# Altium PCB PowerLatch.PcbDoc
Units mm, origin at the board's own origin, x right, y up, seen from the top; angles counter-clockwise.
Board outline 57.53 x 27.52 mm, 2 copper layers (Top Layer, Bottom Layer); 34 components, 14 nets, 79 pads, 1 vias.
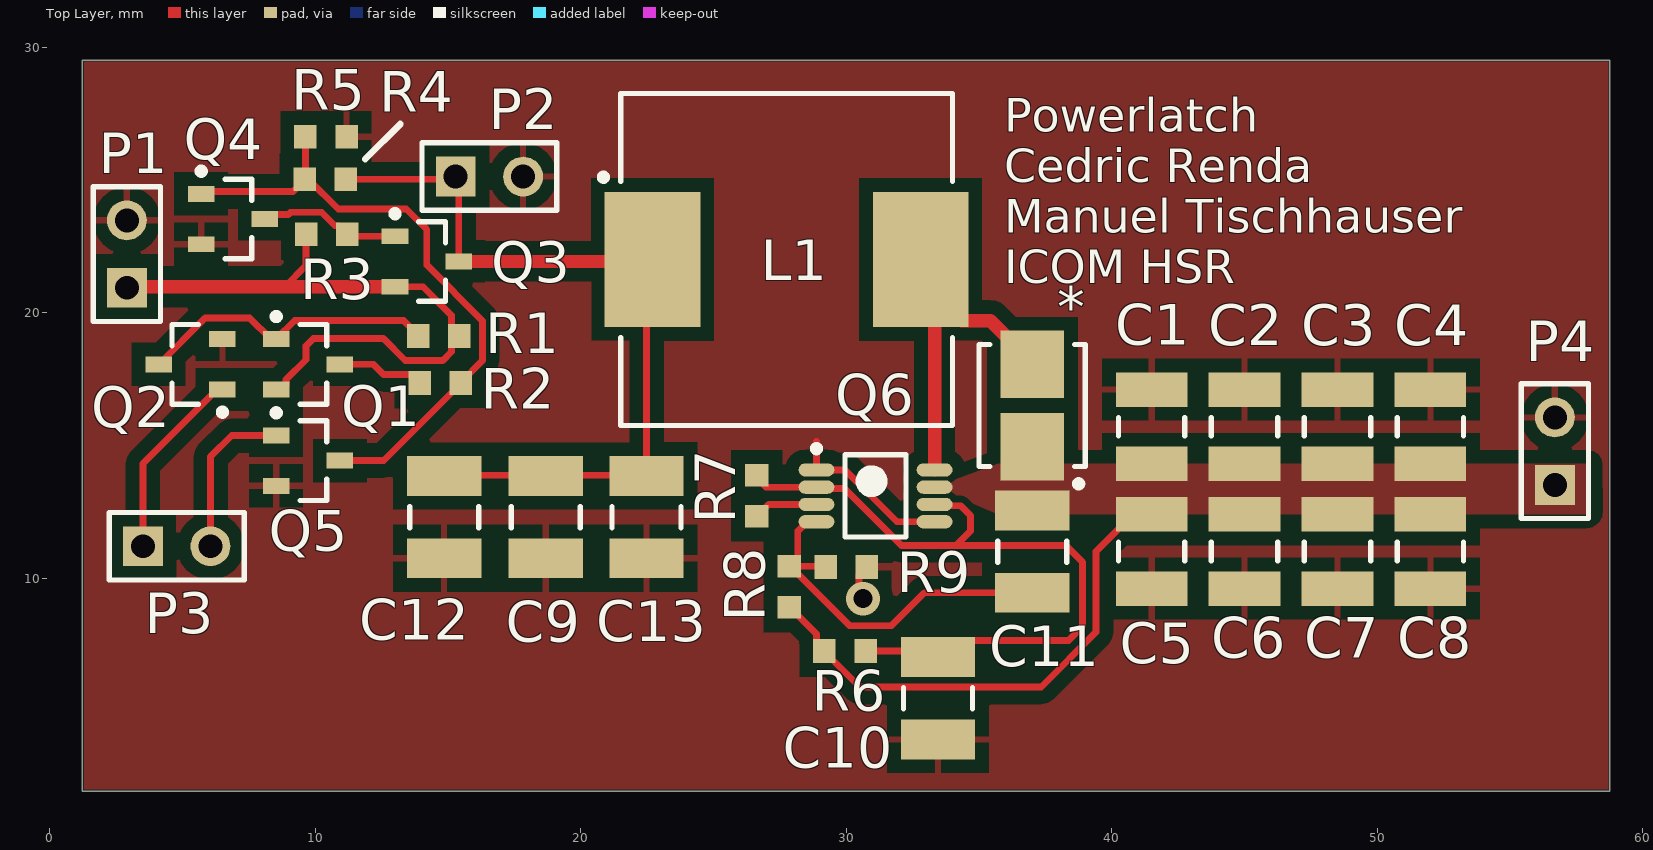
[diagram p0: Top Layer view]
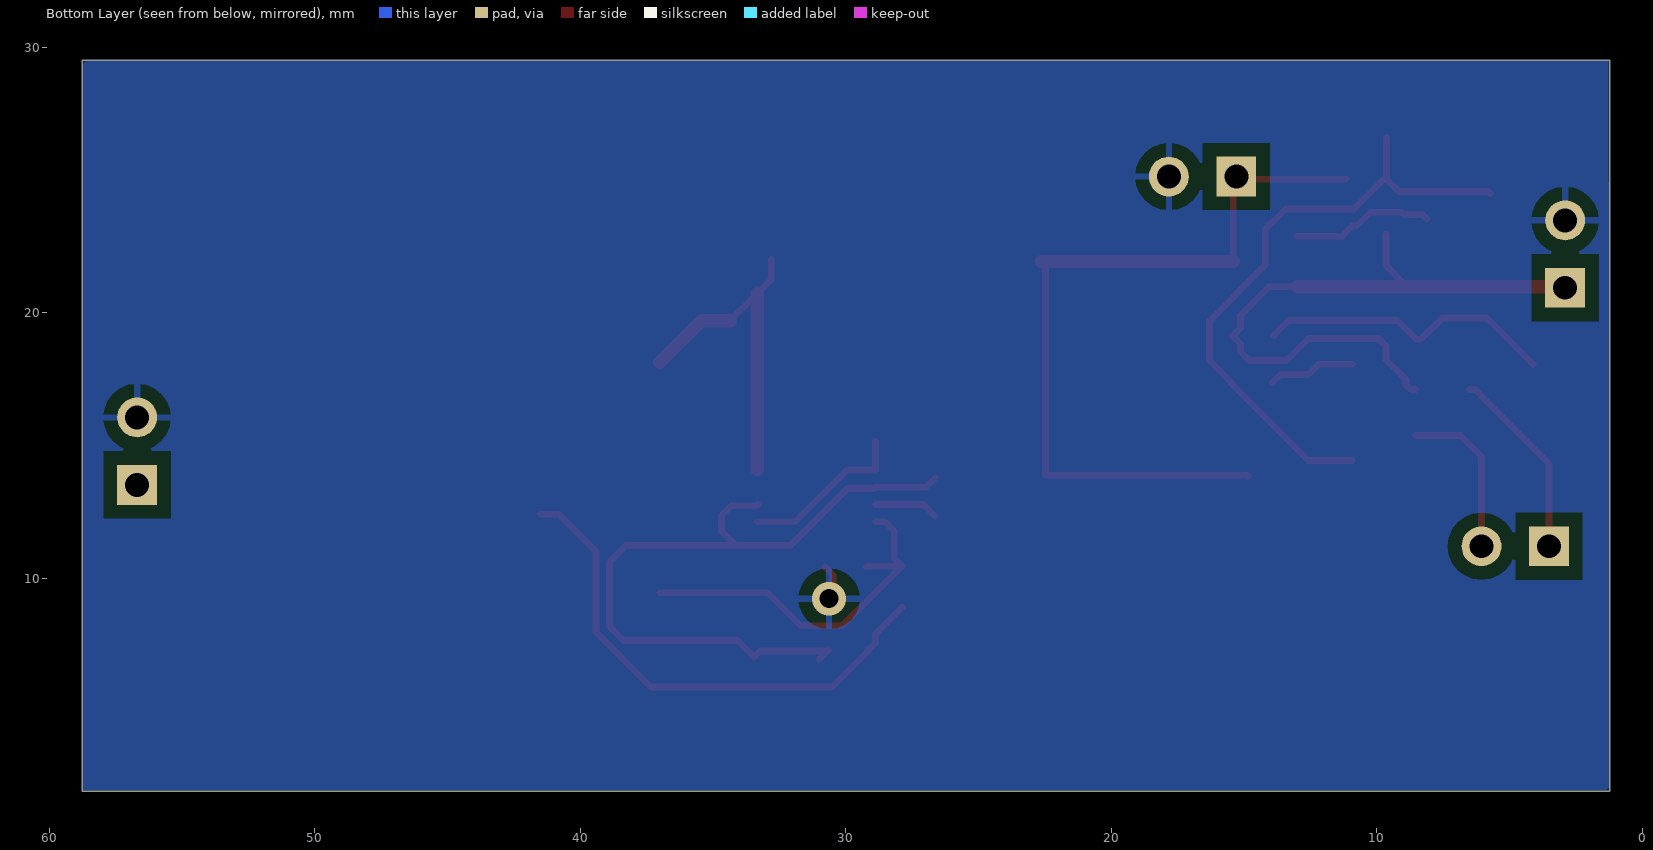
[diagram p1: Bottom Layer view, seen from below]
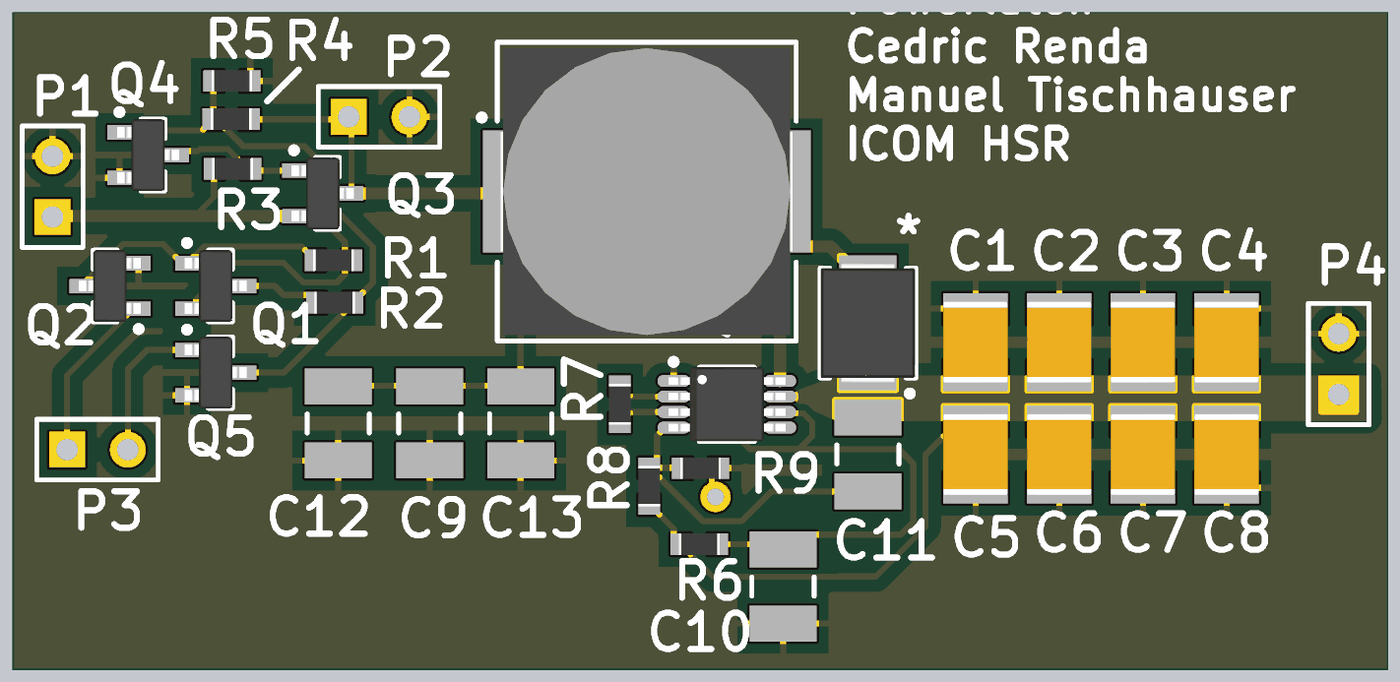
[diagram p2: 3D render of the assembled board from above, using the file's embedded part models]

## Layer stack, top to bottom
Top Solder: solder mask 0.0102, Solder Resist, Dk 3.5
Top Layer: signal copper 0.0356
Dielectric 1: dielectric 0.32, FR-4, Dk 4.8
Bottom Layer: signal copper 0.0356
Bottom Solder: solder mask 0.0102, Solder Resist, Dk 3.5

## Board outline
1.225,1.975 1.225,29.5 58.75,29.5 58.75,1.975

## Design rules (kind name [scope] priority, off if disabled: settings)
Clearance [InComponent('Q6')] p1: gap=0.254 ignorepadtopadclearanceinfootprint=TRUE except(0: Arc-Hole Track-Hole SMDPad-Hole THPad-Hole Via-Hole Fill-Hole Poly-Hole Region-Hole Text-Hole; 0.127: Arc-SMDPad Track-SMDPad SMDPad-SMDPad)
Clearance Clearance_1 [All] p2: gap=0.254 ignorepadtopadclearanceinfootprint=FALSE except(0: Arc-Hole Track-Hole SMDPad-Hole THPad-Hole Via-Hole Fill-Hole Poly-Hole Region-Hole Text-Hole)
Clearance Clearance_2 [InPolygon] p3: gap=0.508 ignorepadtopadclearanceinfootprint=FALSE
ComponentClearance [All] p1: gap=0 collisioncheckmode=3 verticalgap=0 showdistances=TRUE
PolygonConnect [InNet('Net*_2')] p1: connectstyle=Direct reliefconductorwidth=0.254 reliefentries=4 polygonreliefangle="90 Angle" airgapwidth=0.254
PolygonConnect PolygonConnect_1 [All] p2: connectstyle=Relief reliefconductorwidth=0.254 reliefentries=4 polygonreliefangle="90 Angle" airgapwidth=0.508
RoomDefinition PowerLatch [InComponentClass('PowerLatch')] p1 off: confinementstyle=ConfineIn formatcopy=TRUE lockcomponents=FALSE outline 1.3,2.05 58.7,2.05 58.7,29.45 1.3,29.45
RoutingVias [All] p1: holewidth=0.711 width=1.27 viastyle="Through Hole" minholewidth=0.711 minwidth=1.27 maxholewidth=0.711 maxwidth=1.27
SolderMaskExpansion [All] p1: expansion=0.102
Width [All] p1: maxlimit=1.27 minlimit=0.127 preferedwidth=0.254
29 further rules are at their usual default settings.

## Components (designator, comment, footprint, x,y, rotation, side; value= is the part's Value field where it differs from the comment)
* "Schottky" DIOM4336X25N 37,16.5 r270 top
C1 "Cap" CAPC3225X28N 41.5,15.7 r270 top value=22uF
C2 "Cap" CAPC3225X28N 45,15.7 r270 top value=22uF
C3 "Cap" CAPC3225X28N 48.5,15.7 r270 top value=22uF
C4 "Cap" CAPC3225X28N 52,15.7 r270 top value=22uF
C5 "Cap" CAPC3225X28N 41.5,11 r90 top value=22uF
C6 "Cap" CAPC3225X28N 45,11 r90 top value=22uF
C7 "Cap" CAPC3225X28N 48.5,11 r90 top value=22uF
C8 "Cap" CAPC3225X28N 52,11 r90 top value=22uF
C9 "Cap" C1210_M 18.675,12.3 r270 top value=22uF
C10 "Cap" C1210_M 33.45,5.475 r90 top value=1u
C11 "Cap" C1210_M 37,11 r270 top value=39pF
C12 "Cap" C1210_M 14.85,12.3 r270 top value=22uF
C13 "Cap" C1210_M 22.475,12.3 r270 top value=22uF
L1 "Inductor" INDP120120X100N 27.75,22 r0 top
P1 "Header 2" HDR1X2 2.9,20.935 r90 top
P2 "Header 2" HDR1X2 15.285,25.125 r0 top
P3 "Header 2" HDR1X2 3.51,11.2 r0 top
P4 "Header 2" HDR1X2 56.688,13.513 r90 top
Q1 "MOSFET P-Channel" SOT95P245X110-3N 9.725,18.05 r0 top
Q2 "MOSFET N-Channel" SOT95P245X110-3N 5.3,18.05 r180 top
Q3 "MOSFET P-Channel" SOT95P245X110-3N 14.2,21.925 r0 top
Q4 "MOSFET N-Channel" SOT95P245X110-3N 6.9,23.525 r0 top
Q5 "MOSFET N-Channel" SOT95P245X110-3N 9.725,14.425 r0 top
Q6 "LMR61428" TSOP65P490X110-8N 31.1,13.1 r0 top
R1 "Res1" RESC1608X06N 14.65,19.125 r0 top value=10K
R2 "Res1" RESC1608X06N 14.7,17.35 r180 top value=1K
R3 "Res1" RESC1608X06N 10.425,22.95 r180 top value=100K
R4 "Res1" RESC1608X06N 10.375,25.025 r0 top value=1K
R5 "Res1" RESC1608X06N 10.4,26.625 r180 top value=1M
R6 "Res1" RESC1608X06N 29.95,7.25 r0 top value=50
R7 "Res1" RESC1608X06N 26.625,13.1 r270 top value=200K
R8 "Res1" RESC1608X06N 27.85,9.675 r270 top value=150K
R9 "Res1" RESC1608X06N 30,10.425 r0 top value=50K

## Footprints (in the part's own frame and the unit in brackets; to place one, negate y for a bottom-side part, rotate by r counter-clockwise, add the part's x,y. Pads: shape width x height; smd on the part's side, far side on the other; paste and mask are expansions set on the pad)
C1210_M [mm] "Chip Capacitor, Body 3.2x2.5mm, IPC Low Density"
  rect 1.5x2.8 smd: 1(-1.55,0) 2(1.55,0)
  silkscreen extent -0.4,-1.3 0.4,1.3, body extent -1.7,-1.35 1.7,1.35, height 1.5
CAPC3225X28N [mm] "Chip Capacitor, 2-Leads, Body 3.20x2.50mm, IPC Medium Density"
  rect 1.3x2.7 smd: 1(-1.4,0) 2(1.4,0)
  silkscreen extent -0.35,-1.25 0.35,1.25, body extent -1.7,-1.35 1.7,1.35, height 2.8
DIOM4336X25N [mm] "Molded Diode, 2-Leads, Body 4.33x3.63mm, IPC Medium Density"
  rect 2.55x2.4 smd: 1(-1.55,0) 2(1.55,0)
  silkscreen extent -2.3,-2 3.07,2, body extent -2.52,-1.97 2.52,1.97, height 2.47
HDR1X2 [mm] "Connector; Header; 2 Position"
  rect 1.5x1.5 hole 0.9: 1(0,0)
  round 1.5 hole 0.9: 2(2.54,0)
  silkscreen extent -1.27,-1.27 3.81,1.27
INDP120120X100N [mm] "Precision Wire Wound Inductor, 2-Leads, Body 12.00x12.00mm, IPC Medium Density"
  rect 3.6x5.1 smd: 1(-5.05,0) 2(5.05,0)
  silkscreen extent -7.02,-6.25 6.25,6.25, body extent -6.1,-6 6.1,6, height 10.1
RESC1608X06N [mm] "Chip Resistor, 2-Leads, Body 1.60x0.80mm, IPC Medium Density"
  rect 0.85x0.9 smd: 1(-0.775,0) 2(0.775,0)
  body extent -0.85,-0.45 0.85,0.45, height 0.55
SOT95P245X110-3N [mm] "SOT23, 3-Leads, Body 2.90x2.45mm, Pitch 0.95mm, IPC Medium Density"
  rect 1x0.6 smd: 1(-1.2,0.95) 2(-1.2,-0.95) 3(1.2,0)
  silkscreen extent -1.32,-1.5 0.7,1.92, body extent -1.3,-1.5 1.3,1.5, height 1.1
TSOP65P490X110-8N [mm] "TSOP, 8-Leads, Body 3.00x3.00mm, Pitch 0.65mm, IPC Medium Density"
  oval 1.35x0.5 smd: 1(-2.225,0.975) 2(-2.225,0.325) 3(-2.225,-0.325) 4(-2.225,-0.975) 5(2.225,-0.975) 6(2.225,-0.325) 7(2.225,0.325) 8(2.225,0.975)
  silkscreen extent -2.35,-1.55 1.15,1.9, body extent -2.45,-1.55 2.45,1.55, height 1.1

## Part data
C1 C2 C3 C4 C5 C6 C7 C8 C9 C10 C11 C12 C13: "Capacitor", LatestRevisionDate=17-Jul-2002, LatestRevisionNote="Re-released for DXP Platform.", PackageDescription="Radial Cap, Thru-Hole; 2 Leads; 0.3 in Pin Spacing", PackageReference=RAD-0.3, Published=8-Jun-2000, Publisher="Altium Limited"
P1 P2 P3 P4: "Header, 2-Pin", LatestRevisionDate=17-Jul-2002, LatestRevisionNote="Re-released for DXP Platform.", Publisher="Altium Limited"
Q6: "Step-Up Voltage Regulator"
R1 R2 R3 R4 R5 R6 R7 R8 R9: "Resistor", LatestRevisionDate=17-Jul-2002, LatestRevisionNote="Re-released for DXP Platform.", PackageDescription="Axial Device, Thru-Hole; 2 Leads; 0.3 in Pin Spacing", PackageReference=AXIAL-0.3, Published=8-Jun-2000, Publisher="Altium Limited"

## Via types
v1: diameter 1.27, hole 0.711, Top Layer to Bottom Layer, 1 vias

## Nets (pads, with @x,y where several pads share a name; then routed paths per layer and width w, separated by ;. In a path a pad name is that pad's centre, name@x,y a point inside that pad or via, vN(x,y) a via of type N, cw(c..) or ccw(c..) an arc to the next point about the centre after c; other vN are vias at no path point)
GND: C1.1 C2.1 C3.1 C4.1 C5.1 C6.1 C7.1 C8.1 C9.2 C10.1 C12.2 C13.2 P1.2 P2.2 P4.2 Q2.2 Q4.2 Q5.2 Q6.1 Q6.5 R5.1 R9.2 | length 7.3
  Top Layer w0.254: 28.875,15.15 Q6.1 29.95,14.075 31.9,12.125 Q6.5 ; v1@30.477,9.602 30.477,10.127 R9.2
  other v1: 30.625,9.225
Net*_1: *.1 L1.2 Q6.8 | length 13
  Top Layer w0.254: L1.2 32.8,21.25 33.325,20.725 L1.2@34.35,19.7 ; *.1@37,17.975 *.1 *.1@37,18.125
  Top Layer w0.508: Q6.8 L1.2@33.325,20.725 ; L1.2@34.35,19.7 35.425,19.7 *.1@37,18.125
Net*_2: *.2 C1.2 C2.2 C3.2 C4.2 C5.2 C6.2 C7.2 C8.2 C11.1 P4.1 Q6.7 R6.1 R8.2 | length 19.6
  Top Layer w0.254: R8.2 27.875,8.9 28.877,7.898 28.877,7.548 R6.1 29.175,7.225 30.506,5.894 35.744,5.894 35.75,5.9 37.343,5.9 39.408,7.965 39.408,11.008 40.8,12.4 C5.2
NetC9_1: C9.1 C12.1 C13.1 L1.1 P2.1 Q3.3 R4.2 | length 30.5
  Top Layer w0.254: R4.2 15.185,25.025 P2.1 15.4,25.01 Q3.3 ; C12.1 14.875,13.875 18.675,13.875 22.475,13.875 22.475,21.775 22.625,21.925 L1.1
  Top Layer w0.508: Q3.3 L1.1@22.625,21.925
NetC10_2: C10.2 Q6.2 Q6.6 R6.2 R7.1 | length 28.2
  Top Layer w0.254: R7.1@26.625,13.775 26.975,13.425 Q6.2 28.922,13.378 29.929,13.378 32.077,11.23 34.13,11.23 ; R6.2@30.638,7.287 R6.2@30.663,7.312 ; R6.2@30.7,7.25 30.7,7.225 R6.2@30.998,6.927 ; R6.2@30.725,7.275 R6.2 33.225,7.25 C10.2 34.073,7.648 38.373,7.648 38.9,8.175 38.9,10.6 38.275,11.225 34.134,11.225 34.13,11.23 ; Q6.6@33.3,12.75 Q6.6 33.372,12.728 34.297,12.728 34.675,12.35 34.675,11.775 34.13,11.23
NetC11_2: C11.2 Q6.4 R8.1 R9.1 | length 14.3
  Top Layer w0.254: R8.1 R8.1@27.875,10.45 ; Q6.4 28.517,12.125 28.173,11.781 28.173,10.748 R8.1@27.875,10.45 ; R9.1 29.2,10.45 R8.1@27.875,10.45 ; C11.2 32.95,9.45 31.709,8.209 30.116,8.209 R8.1@27.875,10.45
NetP1_1: P1.1 Q1.2 Q3.2 R1.2 R3.2 | length 24.9
  Top Layer w0.254: P1.1 P1.1@2.94,20.975 ; Q1.2 8.725,17.1 8.898,17.273 8.898,17.473 9.65,18.225 9.65,18.75 9.925,19.025 12.561,19.025 13.386,18.2 14.801,18.2 15.127,18.526 15.127,18.827 R1.2 15.127,19.423 15.127,19.898 14.05,20.975 Q3.2 ; 8.85,20.975 9.65,21.775 R3.2
  Top Layer w0.508: P1.1@2.94,20.975 8.85,20.975 Q3.2
NetP3_1: P3.1 Q2.1 | length 7.3
  Top Layer w0.254: P3.1 3.51,14.31 6.127,16.927 6.3,17.1 Q2.1
NetP3_2: P3.2 Q5.1 | length 6.2
  Top Layer w0.254: P3.2 6.05,14.575 6.85,15.375 Q5.1
NetQ1_1: Q1.1 Q2.3 R1.1 | length 11.4
  Top Layer w0.254: Q2.3 5.85,19.8 7.525,19.8 8.325,19 Q1.1 9.225,19.7 13.325,19.7 13.85,19.175 13.85,19.15 R1.1
NetQ1_3: Q1.3 R2.2 | length 3.3
  Top Layer w0.254: Q1.3 12.188,18.05 12.565,17.673 13.627,17.673 13.925,17.375 R2.2
NetQ3_1: Q3.1 Q4.3 R3.1 | length 5.4
  Top Layer w0.254: Q4.3 8.27,23.695 8.981,23.695 9.067,23.781 10.233,23.781 10.741,23.273 10.902,23.273 11.2,22.975 R3.1 11.275,22.875 Q3.1
NetQ4_1: Q4.1 Q5.3 R2.1 R4.1 R5.2 | length 23.9
  Top Layer w0.254: Q4.1 5.783,24.558 9.158,24.558 R4.1@9.6,25 ; R5.2@9.625,26.6 9.625,25.05 R4.1 R4.1@9.6,25 ; Q5.3 12.575,14.425 15.475,17.325 R2.1 15.475,17.375 16.299,18.199 16.299,19.687 14.2,21.786 14.2,23.125 13.425,23.9 10.861,23.9 9.761,25 R4.1@9.6,25
NetQ6_3: Q6.3 R7.2 | length 2.4
  Top Layer w0.254: R7.2 27.075,12.775 Q6.3

## Polygon pours and split planes (outlines as drawn)
GND on Top Layer "Top Layer-GND" (solid, pour order 8): 1.3,29.45 58.7,29.45 58.7,2.05 1.3,2.05
Net*_2 on Top Layer "Top Layer-Net*_2" (solid, pour order 6): 33.325,13.425 35.7,14.3 57.95,14.3 57.984,12.4 35.7,12.4
GND on Bottom Layer "Bottom Layer-GND" (solid, pour order 10): 1.275,29.475 58.625,29.475 58.725,29.375 58.725,2.025 1.275,2.025 1.225,1.975

## Silkscreen, mask and mechanical layers (free items; w line width, h text height)
Top Overlay:
  lines w0.254: 11.875,25.775 13.2,27.1
  text "Powerlatch / Cedric Renda / Manuel Tischhauser / ICOM HSR" at 35.95,21.1 h1.27
Mechanical 15:
  the board outline again, w0.254